# Altium PCB ComponentLib.PcbDoc
Units mil, origin at the board's own origin, x right, y up, seen from the top; angles counter-clockwise.
Board outline 12677.17 x 7086.61 mil, 4 copper layers (Top Layer, GND, Mid-Layer 2, Bottom Layer), stack 62.206 mil thick; 4 components, 291 nets, 319 pads, 113 vias.
Unrouted connection lines stored in the file: 78.
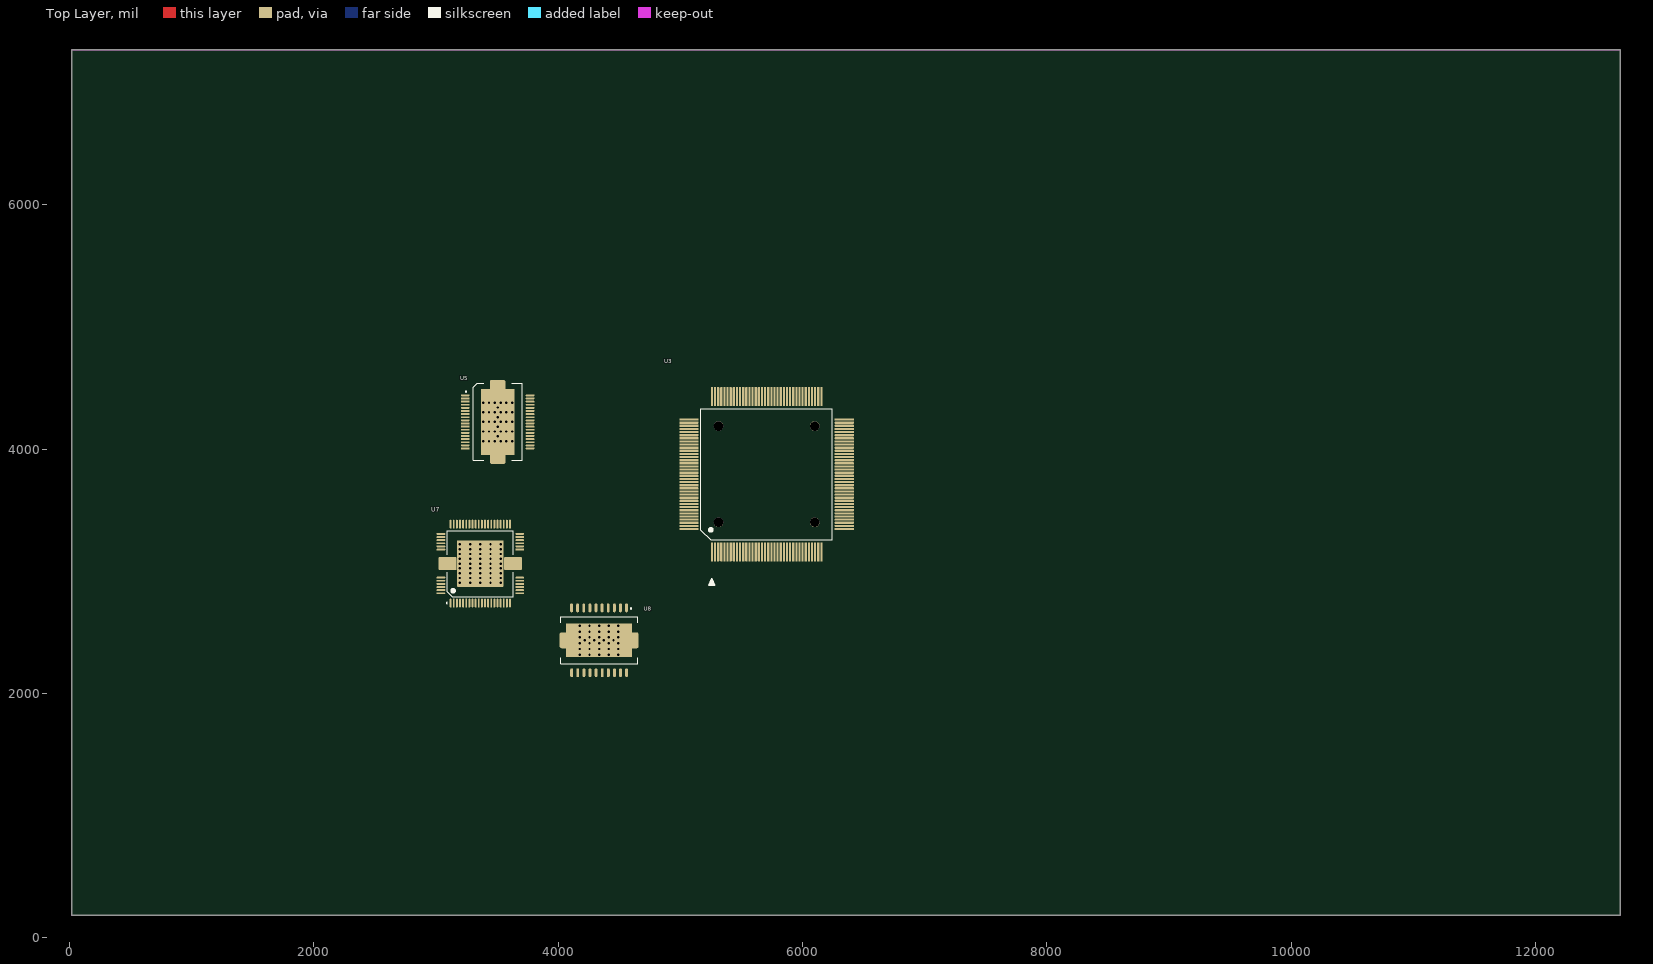
[diagram p0: Top Layer view]
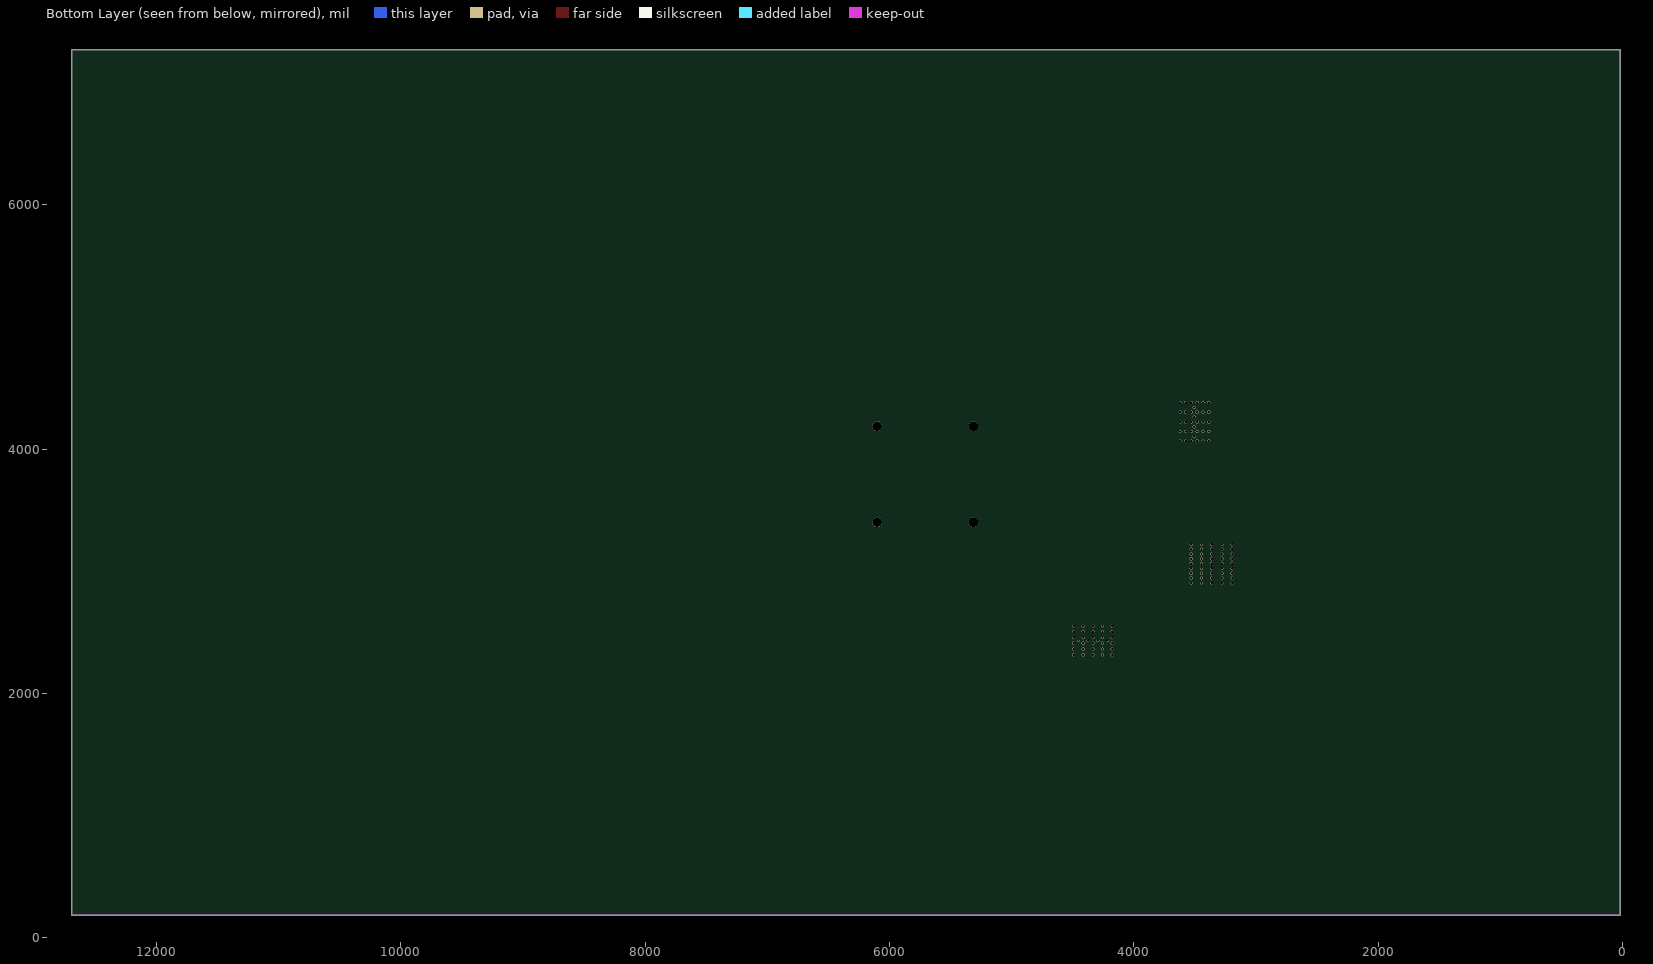
[diagram p1: Bottom Layer view, seen from below]

## Layer stack, top to bottom
Top Solder: solder mask 0.394, Solder Resist, Dk 3.5
Top Layer: signal copper 1.378
Dielectric1: core 18.898, FR-4, Dk 4.8
GND: signal copper 1.378
Dielectric3: core 18.898, FR-4, Dk 4.8
Mid-Layer 2: signal copper 1.378
Dielectric2: prepreg 18.898, FR-4, Dk 4.8
Bottom Layer: signal copper 1.378
Bottom Solder: solder mask 0.394, Solder Resist, Dk 3.5

## Board outline
18,183 18,7269.61 12695.17,7269.61 12695.17,183

## Design rules (kind name [scope] priority, off if disabled: settings)
Clearance "Width = 9.9" [Width = 9.9 vs Width = 9.9] p1: gap=9.46 ignorepadtopadclearanceinfootprint=FALSE except(0: Arc-Hole Track-Hole SMDPad-Hole THPad-Hole Via-Hole Fill-Hole Poly-Hole Region-Hole Text-Hole)
Clearance "P/PG-DSO-20 & MQFP-64-10 & SOT363_N" [HasFootprint('P/PG-DSO-36') OR HasFootprint('MQFP-64-10') OR HasFootprint('SOT363_N') vs All - (InPolygon)] p2: gap=9.84 ignorepadtopadclearanceinfootprint=FALSE except(0: Arc-Hole Track-Hole SMDPad-Hole THPad-Hole Via-Hole Fill-Hole Poly-Hole Region-Hole Text-Hole)
Clearance TSOP48_N [HasFootprint('TSOP48_N')] p3: gap=7.87 ignorepadtopadclearanceinfootprint=FALSE except(0: Arc-Hole Track-Hole SMDPad-Hole THPad-Hole Via-Hole Fill-Hole Poly-Hole Region-Hole Text-Hole)
Clearance SOMQ144-Y [HasFootprint('SOMQ144-Y') vs All - (InPolygon)] p4: gap=7.87 ignorepadtopadclearanceinfootprint=FALSE except(0: Arc-Hole Track-Hole SMDPad-Hole THPad-Hole Via-Hole Fill-Hole Poly-Hole Region-Hole Text-Hole)
Clearance "Keep-Out Layer" [OnLayer('Keep-Out Layer') vs INPOLYGON] p5: gap=30 ignorepadtopadclearanceinfootprint=FALSE except(0: Arc-Hole Track-Hole SMDPad-Hole THPad-Hole Via-Hole Fill-Hole Poly-Hole Region-Hole Text-Hole)
Clearance poly-poly [(InPolygon) vs (InPolygon)] p6: gap=30 ignorepadtopadclearanceinfootprint=FALSE except(0: Arc-Hole Track-Hole SMDPad-Hole THPad-Hole Via-Hole Fill-Hole Poly-Hole Region-Hole Text-Hole)
Clearance "All Poly" [All vs (InPolygon)] p7: gap=25 ignorepadtopadclearanceinfootprint=FALSE except(0: Arc-Hole Track-Hole SMDPad-Hole THPad-Hole Via-Hole Fill-Hole Poly-Hole Region-Hole Text-Hole)
Clearance [All] p8: gap=12 ignorepadtopadclearanceinfootprint=FALSE except(0: Arc-Hole Track-Hole SMDPad-Hole THPad-Hole Via-Hole Fill-Hole Poly-Hole Region-Hole Text-Hole)
ComponentClearance TP2 [HasFootprint('TP2') vs HasFootprint('TP2')] p1: gap=15 collisioncheckmode=3 verticalgap=15 showdistances=FALSE
ComponentClearance [All] p2: gap=15 collisioncheckmode=3 verticalgap=15 showdistances=FALSE
DiffPairsRouting [All] p1 off: maxlimit=10 minlimit=10 mostfreqgap=10 toplayer_minwidth=15 toplayer_maxwidth=15 toplayer_prefwidth=15 midlayer1_minwidth=15 midlayer1_maxwidth=15 midlayer1_prefwidth=15 midlayer2_minwidth=15 midlayer2_maxwidth=15 midlayer2_prefwidth=15 bottomlayer_minwidth=15 bottomlayer_maxwidth=15 bottomlayer_prefwidth=15 maxuncoupledlength=500
FabricationTestpoint [(IsPad And (OnTopLayer Or OnBottomLayer))] p1: side=3 testpointundercomponent=TRUE minsize=40 maxsize=100 preferedsize=60 minholesize=0 maxholesize=40 preferedholesize=32 testpointgrid=1 allowsidetop=TRUE allowsidebottom=TRUE usegrid=TRUE gridtolerance=0.01
Height [All] p1 off: minheight=0 maxheight=1000 prefheight=500
HoleSize [All] p1: absolutevalues=TRUE maxlimit=340 minlimit=1 maxpercent=80.000 minpercent=20.000
HoleToHoleClearance "ADP & DPDT-SW &" [HasFootprint('ADP') OR HasFootprint('DPDT-SW ') OR HasFootprint('SPDT-SW-2')] p1: gap=0 allowstackedmicrovias=TRUE
HoleToHoleClearance [All] p2: gap=10 allowstackedmicrovias=TRUE
MinimumAnnularRing [All] p1 off: minimumring=10
MinimumSolderMaskSliver SOT363_N [HasFootprint('SOT363_N')] p1: minsoldermaskwidth=1.84
MinimumSolderMaskSliver [All] p2: minsoldermaskwidth=10
NetAntennae [All] p1 off: netantennaetolerance=0
PasteMaskExpansion [All] p1: expansion=-1.97
PolygonConnect "Holesize = 236.22" [Holesize = 236.22] p1: connectstyle=Direct reliefconductorwidth=10 reliefentries=4 polygonreliefangle="90 Angle" airgapwidth=10
PolygonConnect U8_21 [All vs InPadClass('U8-21')] p2: connectstyle=Direct reliefconductorwidth=10 reliefentries=4 polygonreliefangle="90 Angle" airgapwidth=10
PolygonConnect U7_65 [All vs InPadClass('U7-65')] p3: connectstyle=Direct reliefconductorwidth=10 reliefentries=4 polygonreliefangle="90 Angle" airgapwidth=10
PolygonConnect U5_37 [All vs InPadClass('U5-37')] p4: connectstyle=Direct reliefconductorwidth=10 reliefentries=4 polygonreliefangle="90 Angle" airgapwidth=10
PolygonConnect "VIA_Direct Connect" [All vs IsVia] p5: connectstyle=Direct reliefconductorwidth=10 reliefentries=4 polygonreliefangle="90 Angle" airgapwidth=10
PolygonConnect [All] p6: connectstyle=Relief reliefconductorwidth=25 reliefentries=4 polygonreliefangle="90 Angle" airgapwidth=10
RoutingVias [All] p1: holewidth=19.68 width=40 viastyle="Through Hole" minholewidth=19.68 minwidth=25.5 maxholewidth=27.56 maxwidth=50
ShortCircuit ShortCircuit_1 [InNet('GND1') vs InNet('GND')] p1: allowed=TRUE
ShortCircuit [All] p2: allowed=FALSE
SilkToSilkClearance [All] p1: silktosilkclearance=2
SilkToSolderMaskClearance SilkToSolderMaskClearance_1 [IsPad] p1: minsilkscreentomaskgap=6 clearancetoexposedcopper=TRUE
SolderMaskExpansion [All] p1: expansion=4 istentingtop=FALSE
Width [All] p1: maxlimit=100 minlimit=1 preferedwidth=12 midlayer1_minwidth=12 midlayer2_minwidth=12 bottomlayer_minwidth=9.9 minimp=50.000000 maximp=50.000000 favimp=50.000000
18 further rules are at their usual default settings.

## Classes and differential pairs
pad class U5-37: U5-37
pad class U3-65: U3-65
pad class "Direct Connect": U8-65
net class 1: A31_DO_IGC2 A32_DO_IGC1
pad class U7-65: U7-65
pad class U8-21: U8-21
differential pair CRK: +CRK_P -CRK_N
differential pair CAN: +CAN_P -CAN_N

## Components (designator, comment, footprint, x,y, rotation, side; value= is the part's Value field where it differs from the comment)
U3 "ST10F273M" SOMQ144-Y 5707,3794 r0 top (schematic designator V9)
U5 "L9741" P/PG-DSO-36 3505.35,4222.48 r270 top (schematic designator U7)
U7 "TLE6244x" MQFP-64-10 3363.11,3062.83 r0 top (schematic designator U9)
U8 "L9935013TR" P/PG-DSO-20 4335.5,2434.65 r180 top

## Footprints (in the part's own frame and the unit in brackets; to place one, negate y for a bottom-side part, rotate by r counter-clockwise, add the part's x,y. Pads: shape width x height; smd on the part's side, far side on the other; paste and mask are expansions set on the pad)
MQFP-64-10 [mm]
  oval 0.4x1.83 smd mask+0.127: 1(-6.175,-8.2) 2(-5.525,-8.2) 3(-4.875,-8.2) 4(-4.225,-8.2) 5(-3.575,-8.2) 6(-2.925,-8.2) 7(-2.275,-8.2) 8(-1.625,-8.2) 9(-0.975,-8.2) 10(-0.325,-8.2) 11(0.325,-8.2) 12(0.975,-8.2) 13(1.625,-8.2) 14(2.275,-8.2) 15(2.925,-8.2) 16(3.575,-8.2) 17(4.225,-8.2) 18(4.875,-8.2) 19(5.525,-8.2) 20(6.175,-8.2) 33(6.175,8.2) 34(5.525,8.2) 35(4.875,8.2) 36(4.225,8.2) 37(3.575,8.2) 38(2.925,8.2) 39(2.275,8.2) 40(1.625,8.2) 41(0.975,8.2) 42(0.325,8.2) 43(-0.325,8.2) 44(-0.975,8.2) 45(-1.625,8.2) 46(-2.275,8.2) 47(-2.925,8.2) 48(-3.575,8.2) 49(-4.225,8.2) 50(-4.875,8.2) 51(-5.525,8.2) 52(-6.175,8.2)
  oval 1.83x0.4 smd mask+0.127: 21(8.2,-6.175) 22(8.2,-5.525) 23(8.2,-4.875) 24(8.2,-4.225) 25(8.2,-3.575) 26(8.2,-2.925) 27(8.2,2.925) 28(8.2,3.575) 29(8.2,4.225) 30(8.2,4.875) 31(8.2,5.525) 32(8.2,6.175) 53(-8.2,6.175) 54(-8.2,5.525) 55(-8.2,4.875) 56(-8.2,4.225) 57(-8.2,3.575) 58(-8.2,2.925) 59(-8.2,-2.925) 60(-8.2,-3.575) 61(-8.2,-4.225) 62(-8.2,-4.875) 63(-8.2,-5.525) 64(-8.2,-6.175)
  rrect25% 1.3x2.3 smd paste+0 mask+0: 65(-7.4,0) 65(-5.7,0) 65(5.7,0) 65(7.4,0)
  rrect10% 3.7x2.65 smd paste-3.8 mask+0: 65(-6.8,0) 65(6.8,0)
  rrect50% 0.6x2.3 smd paste+0 mask+0: 65(-3.187,-2.9) 65(-3.187,0) 65(-3.187,2.9) 65(-1.063,-2.9) 65(-1.063,0) 65(-1.063,2.9) 65(1.063,-2.9) 65(1.063,0) 65(1.063,2.9) 65(3.188,-2.9) 65(3.188,0) 65(3.188,2.9)
  rrect25% 0.8x9.7 smd paste-0.8 mask+0: 65(-3.187,0) 65(-1.063,0) 65(1.063,0) 65(3.188,0)
  rrect5% 9.7x9.7 smd paste-9.8 mask-9.8: 65(0,0)
  silkscreen extent -7.07,-8.32 6.82,6.81, body extent -9.11,-9.11 9.12,9.12, height 3.33
P/PG-DSO-20 [mm]
  oval 0.6x1.83 smd: 1(-5.702,-6.74) 2(-4.432,-6.74) 3(-3.162,-6.74) 4(-1.892,-6.74) 5(-0.622,-6.74) 6(0.648,-6.74) 7(1.918,-6.74) 8(3.188,-6.74) 9(4.458,-6.74) 10(5.728,-6.74) 11(5.702,6.74) 12(4.432,6.74) 13(3.162,6.74) 14(1.892,6.74) 15(0.622,6.74) 16(-0.648,6.74) 17(-1.918,6.74) 18(-3.188,6.74) 19(-4.458,6.74) 20(-5.728,6.74)
  rrect25% 2.3x3.2 smd: 21(-7,0) 21(7,0)
  rrect25% 3x3.3 smd paste-3.3: 21(-6.7,0) 21(6.7,0)
  rrect50% 0.5x2.5 smd: 21(-3,2) 21(-3,-2) 21(-1,2) 21(-1,-2) 21(1,2) 21(1,-2) 21(3,2) 21(3,-2)
  rect 13.7x7 smd paste-3.5 mask-3.5: 21(0,0)
  silkscreen extent -8.01,-6.72 7.99,4.9, body extent -8.2,-7.66 8.2,7.66, height 3.64
P/PG-DSO-36 [mm]
  oval 0.4x1.83 smd mask+0.127: 1(-5.525,-6.74) 2(-4.875,-6.74) 3(-4.225,-6.74) 4(-3.575,-6.74) 5(-2.925,-6.74) 6(-2.275,-6.74) 7(-1.625,-6.74) 8(-0.975,-6.74) 9(-0.325,-6.74) 10(0.325,-6.74) 11(0.975,-6.74) 12(1.625,-6.74) 13(2.275,-6.74) 14(2.925,-6.74) 15(3.575,-6.74) 16(4.225,-6.74) 17(4.875,-6.74) 18(5.525,-6.74) 19(5.525,6.74) 20(4.875,6.74) 21(4.225,6.74) 22(3.575,6.74) 23(2.925,6.74) 24(2.275,6.74) 25(1.625,6.74) 26(0.975,6.74) 27(0.325,6.74) 28(-0.325,6.74) 29(-0.975,6.74) 30(-1.625,6.74) 31(-2.275,6.74) 32(-2.925,6.74) 33(-3.575,6.74) 34(-4.225,6.74) 35(-4.875,6.74) 36(-5.525,6.74)
  rrect25% 2.9x3.2 smd: 37(-7.3,0) 37(7.3,0)
  rrect50% 0.5x2.5 smd: 37(-5,2) 37(-5,-2) 37(-3,2) 37(-3,-2) 37(-1,2) 37(-1,-2) 37(1,2) 37(1,-2) 37(3,2) 37(3,-2) 37(5,2) 37(5,-2)
  rect 13.7x7 smd paste-3.5 mask-3.5: 37(0,0)
  silkscreen extent -8,-6.72 8,5.1, body extent -8.75,-7.65 8.75,7.66, height 3.53
SOMQ144-Y [mm]
  rrect50% 0.45x4 smd: 1(-11.375,-16.15) 2(-10.725,-16.15) 3(-10.075,-16.15) 4(-9.425,-16.15) 5(-8.775,-16.15) 6(-8.125,-16.15) 7(-7.475,-16.15) 8(-6.825,-16.15) 9(-6.175,-16.15) 10(-5.525,-16.15) 11(-4.875,-16.15) 12(-4.225,-16.15) 13(-3.575,-16.15) 14(-2.925,-16.15) 15(-2.275,-16.15) 16(-1.625,-16.15) 17(-0.975,-16.15) 18(-0.325,-16.15) 19(0.325,-16.15) 20(0.975,-16.15) 21(1.625,-16.15) 22(2.275,-16.15) 23(2.925,-16.15) 24(3.575,-16.15) 25(4.225,-16.15) 26(4.875,-16.15) 27(5.525,-16.15) 28(6.175,-16.15) 29(6.825,-16.15) 30(7.475,-16.15) 31(8.125,-16.15) 32(8.775,-16.15) 33(9.425,-16.15) 34(10.075,-16.15) 35(10.725,-16.15) 36(11.375,-16.15) 73(11.375,16.15) 74(10.725,16.15) 75(10.075,16.15) 76(9.425,16.15) 77(8.775,16.15) 78(8.125,16.15) 79(7.475,16.15) 80(6.825,16.15) 81(6.175,16.15) 82(5.525,16.15) 83(4.875,16.15) 84(4.225,16.15) 85(3.575,16.15) 86(2.925,16.15) 87(2.275,16.15) 88(1.625,16.15) 89(0.975,16.15) 90(0.325,16.15) 91(-0.325,16.15) 92(-0.975,16.15) 93(-1.625,16.15) 94(-2.275,16.15) 95(-2.925,16.15) 96(-3.575,16.15) 97(-4.225,16.15) 98(-4.875,16.15) 99(-5.525,16.15) 100(-6.175,16.15) 101(-6.825,16.15) 102(-7.475,16.15) 103(-8.125,16.15) 104(-8.775,16.15) 105(-9.425,16.15) 106(-10.075,16.15) 107(-10.725,16.15) 108(-11.375,16.15)
  rrect50% 4x0.45 smd: 37(16.15,-11.375) 38(16.15,-10.725) 39(16.15,-10.075) 40(16.15,-9.425) 41(16.15,-8.775) 42(16.15,-8.125) 43(16.15,-7.475) 44(16.15,-6.825) 45(16.15,-6.175) 46(16.15,-5.525) 47(16.15,-4.875) 48(16.15,-4.225) 49(16.15,-3.575) 50(16.15,-2.925) 51(16.15,-2.275) 52(16.15,-1.625) 53(16.15,-0.975) 54(16.15,-0.325) 55(16.15,0.325) 56(16.15,0.975) 57(16.15,1.625) 58(16.15,2.275) 59(16.15,2.925) 60(16.15,3.575) 61(16.15,4.225) 62(16.15,4.875) 63(16.15,5.525) 64(16.15,6.175) 65(16.15,6.825) 66(16.15,7.475) 67(16.15,8.125) 68(16.15,8.775) 69(16.15,9.425) 70(16.15,10.075) 71(16.15,10.725) 72(16.15,11.375) 109(-16.15,11.375) 110(-16.15,10.725) 111(-16.15,10.075) 112(-16.15,9.425) 113(-16.15,8.775) 114(-16.15,8.125) 115(-16.15,7.475) 116(-16.15,6.825) 117(-16.15,6.175) 118(-16.15,5.525) 119(-16.15,4.875) 120(-16.15,4.225) 121(-16.15,3.575) 122(-16.15,2.925) 123(-16.15,2.275) 124(-16.15,1.625) 125(-16.15,0.975) 126(-16.15,0.325) 127(-16.15,-0.325) 128(-16.15,-0.975) 129(-16.15,-1.625) 130(-16.15,-2.275) 131(-16.15,-2.925) 132(-16.15,-3.575) 133(-16.15,-4.225) 134(-16.15,-4.875) 135(-16.15,-5.525) 136(-16.15,-6.175) 137(-16.15,-6.825) 138(-16.15,-7.475) 139(-16.15,-8.125) 140(-16.15,-8.775) 141(-16.15,-9.425) 142(-16.15,-10.075) 143(-16.15,-10.725) 144(-16.15,-11.375)
  round 2 hole 2 unplated: ""(-10,-10) ""(-10,10) ""(10,-10) ""(10,10)
  silkscreen extent -13.65,-23.06 13.65,13.65, body extent -19.93,-19.95 19.95,19.95, height 11.2

## Part data
U3: "Microcontroller"
U5: "POWERSO-36"
U7: "G-MQFP-64-10"
U8: library part L9935_B, "PowerSO20"

## Via types
v1: diameter 25.59, hole 19.68, Top Layer to Bottom Layer, tented both sides, 113 vias

## Nets (pads, with @x,y where several pads share a name; then routed paths per layer and width w, separated by ;. In a path a pad name is that pad's centre, name@x,y a point inside that pad or via, vN(x,y) a via of type N, cw(c..) or ccw(c..) an arc to the next point about the centre after c; other vN are vias at no path point)
A1_STEPO_STPB_POS: U8.13
A1_STEPO_STPB_POS_CON: 
A2_STEPO_STPB_NEG: U8.9
A2_STEPO_STPB_NEG_CON: 
A5_CVVT: U7.9
A5_CVVT_CON: 
A7_DO_RLY_MAIN: 
A7_DO_RLY_MAIN_CON: 
A9_DO_RLY_FAN_H: U7.45
A10_DO_RLY_FAN_L: U7.44
A10_DO_RLY_FAN_L_CON: 
A14_AI_VLS_DWN: 
A31_DO_IGC2: 
A32_DO_IGC1: 
A35_PWMO_LSH_UPO2: U7.2 U7.3
A35_PWMO_LSH_UPO2_CON: 
A39_DO_HOT_LAMP: U7.57
A41_DO_RLY_ACCO: U7.49
A42_AI_KNKS: 
A44_AI_VLS_UP: 
A45_AI_DIAGFAN: 
A61_STEPO_STPA_POS: U8.2
A61_STEPO_STPA_POS_CON: 
A62_STEPO_STPA_NEG: U8.18
A62_STEPO_STPA_NEG_CON: 
A64_PWMO_LSH_DOWNO2: U7.50 U7.51
A66_AI_VB_RLY: U8.16
A68_PWMO_ESS: U7.34 U7.35
A68_PWMO_ESS_CON: 
A69_DO_RLY_EFP: U7.8
A69_DO_RLY_EFP_CON: 
A71_DO_MIL: U7.60
A73_PWMO_CPPWM: U7.18 U7.19
A73_PWMO_CPPWM_CON: 
A74_AI_TPS: 
A75_AI_MAP: 
B18_AI_TACE: 
B21_VCCO_VCC3_TPS: U5.16
B22_DI_CAM1: 
B23_DI_PRS_SWT: 
B27_DI_CLU_SWI: 
B29_VB_IGK: 
B30_VBD: 
B46_AI_FTL: 
B50_VCCO_TMAP: U5.15
B51_FREQI_VS: 
B52_DI_ACIN: 
B53_FREQI_VS_RR: 
B56_KLINE_DIAG: U5.7
B58_BSL: 
B59_DO_IV1: U7.16 U7.17
B59_DO_IV1_CON: 
B60_DO_IV3: U7.14 U7.15
B60_DO_IV3_CON: 
B76_AI_TCO: 
B78_AI_TIA: 
B83_DI_PSTE_SWI: 
B87_DI_ACP_SWI: 
B89_DO_IV4: U7.38 U7.39
B89_DO_IV4_CON: 
B90_DO_IV2: U7.36 U7.37
B90_DO_IV2_CON: 
C167_HBR_E\N\: U3.68
CAN_N: U5.13
CAN_P: U5.14
CRK_N: 
CRK_P: 
E\A\: U3.99
FLASHCS: 
GND: U3.18 U3.38 U3.45 U3.55 U3.71 U3.83 U3.94 U3.97 U3.110 U3.127 U3.139 U3.143 U5.1 U5.37 U7.11 U7.12 U7.26 U7.27 U7.29 U7.41 U7.42 U7.58 U7.59 U7.65 U8.1 U8.10 U8.11 U8.20 U8.21
  other v1: 4178.02,2316.54 4256.76,2316.54 4335.5,2316.54 4414.24,2316.54 4492.98,2316.54 4178.02,2363.78 4256.76,2363.78 4335.5,2363.78 4414.24,2363.78 4492.98,2363.78 4178.02,2411.02 4256.76,2411.02 4335.5,2411.02 4414.24,2411.02 4492.98,2411.02 4217.39,2434.65 4296.13,2434.65 4374.87,2434.65 4453.61,2434.65 4178.02,2458.27 4256.76,2458.27 4335.5,2458.27 4414.24,2458.27 4492.98,2458.27 4178.02,2505.51 4256.76,2505.51 4335.5,2505.51 4414.24,2505.51 4492.98,2505.51 4178.02,2552.76 4256.76,2552.76 4335.5,2552.76 4414.24,2552.76 4492.98,2552.76 3195.79,2905.35 3279.45,2905.35 3363.11,2905.35 3446.77,2905.35 3530.43,2905.35 3195.79,2944.72 3279.45,2944.72 3363.11,2944.72 3446.77,2944.72 3530.43,2944.72 3195.79,2984.09 3279.45,2984.09 3363.11,2984.09 3446.77,2984.09 3530.43,2984.09 3195.79,3023.46 3279.45,3023.46 3363.11,3023.46 3446.77,3023.46 3530.43,3023.46 3195.79,3062.83 3279.45,3062.83 3363.11,3062.83 3446.77,3062.83 3530.43,3062.83 3195.79,3102.2 3279.45,3102.2 3363.11,3102.2 3446.77,3102.2 3530.43,3102.2 3195.79,3141.57 3279.45,3141.57 3363.11,3141.57 3446.77,3141.57 3530.43,3141.57 3195.79,3180.94 3279.45,3180.94 3363.11,3180.94 3446.77,3180.94 3530.43,3180.94 3195.79,3220.31 3279.45,3220.31 3363.11,3220.31 3446.77,3220.31 3530.43,3220.31 3387.24,4065 3434.48,4065 3481.73,4065 3528.97,4065 3576.22,4065 3623.46,4065 3505.35,4104.37 3387.24,4143.74 3434.48,4143.74 3481.73,4143.74 3528.97,4143.74 3576.22,4143.74 3623.46,4143.74 3505.35,4183.11 3387.24,4222.48 3434.48,4222.48 3481.73,4222.48 3528.97,4222.48 3576.22,4222.48 3623.46,4222.48 3505.35,4261.85 3387.24,4301.22 3434.48,4301.22 3481.73,4301.22 3528.97,4301.22 3576.22,4301.22 3623.46,4301.22 3505.35,4340.59 3387.24,4379.96 3434.48,4379.96 3481.73,4379.96 3528.97,4379.96 3576.22,4379.96 3623.46,4379.96
HBR_E\N\: U8.8
HOT_LAMP_C: U7.7 U7.22 U7.43 U7.46 U7.48 U7.61
IGC1_FB: 
IGC2_FB: 
MRST: U3.75 U8.5
MTSR: U3.76 U7.55 U8.4
NC: U5.21 U5.26
NetC3_1: 
NetC6_1: 
NetC12_1: U3.56
NetC14_2: 
NetC30_1: U5.18
NetC41_1: 
NetC55_1: 
NetC60_2: U7.23
NetC62_2: 
NetC80_2: U8.15
NetC81_2: U8.14
NetC92_2: 
NetC99_2: U5.33
NetC102_1: U5.32
NetC104_2: U5.35
NetC109_2: U5.22
NetC114_1: 
NetC117_1: 
NetC120_1: 
NetC123_1: 
NetC123_2: 
NetC126_2: U3.84
NetD2_1: 
NetD2_2: 
NetD3_2: U7.4
NetD5_1: 
NetD5_2: 
NetD6_1: 
NetD11_2: 
NetD21_1: 
NetD22_1: 
NetD22_2: U3.11
NetD23_1: 
NetD23_2: U3.24
NetD24_1: 
NetD37_1: 
NetD38_1: 
NetD39_1: 
NetDZ2_1: 
NetFUSE1_1: 
NetIGK_1: 
NetJ1_1: 
NetJ2_1: 
NetJ3_1: 
NetJ4_1: 
NetJ5_1: 
NetJ6_1: 
NetJ7_1: 
NetJ8_1: 
NetJ9_1: 
NetJ11_1: 
NetJ13_1: 
NetJ14_1: 
NetJ16_1: 
NetJ17_1: 
NetJ19_1: 
NetQ1_3: 
NetQ1_6: 
NetQ2_1: 
NetQ3_1: 
NetQ4_3: 
NetR28_1: 
NetR29_1: 
NetR32_1: 
NetR38_2: U7.53
NetR45_1: U7.25
NetR46_1: U7.28
NetR47_1: U7.30
NetR53_1: U8.19
NetR65_1: U8.12
NetR70_1: 
NetR76_1: 
NetR88_1: 
NetR89_2: 
NetR103_2: U5.34
NetR125_2: U5.30
NetR130_1: 
NetTP12_1: 
NetTP13_1: 
NetTP14_1: 
NetTP17_1: 
NetTP20_1: 
NetTP21_1: 
NetTP46_1: U3.98
NetTP165_1: U3.12
NetTP167_1: U3.15
NetTP168_1: U3.16
NetTP170_1: U3.19
NetTP175_1: U3.25
NetTP262_1: 
NetTP266_1: 
NetTP267_1: 
NetTP269_1: 
NOTRSTOUT: U7.31
P04: U3.104
RLY_MAIN_ONBOARD: 
RST: U3.140 U5.20
RX: U3.78 U5.9
RXC: U3.90 U5.11
SCLK: U3.80 U7.54 U8.3
TX: U3.77 U5.6
TXC: U3.91 U5.12
U1_1_C\S\0\: U3.1
U1_2_C\S\1\: U3.2
U1_3_C\S\2\: U3.3
U1_3_C\S\2\_1: 
U1_4_P6.3/C\S\3\: U3.4
U1_5_P6.4/C\S\4\: U3.5
U1_6_P6.5/H\O\L\D\: U3.6
U1_7_P6.6/H\L\D\A\: U3.7 U5.36
U1_8_P6.7/B\R\E\Q\: U3.8 U7.56
U1_9_P8.0/CC16IO: U3.9 U7.5
U1_10_P8.1/CC17IO: U3.10 U7.62
U1_13_P8.4/CC20IO: U3.13 U7.20
U1_14_P8.5/CC21IO: U3.14
U1_20_P7.1/POUT1: U3.20 U7.10
U1_21_P7.2/POUT2: U3.21
U1_22_P7.4/POUT3: U3.22 U7.1
U1_23_P7.4/CC28IO: U3.23 U7.33
U1_25_CS_CRK_TH: U3.66 U5.31
U1_26_P7.7/CC31IO: U3.26
U1_27_P5.0/AN0: U3.27
U1_28: U3.28
U1_29_P5.2/AN2: U3.29
U1_30_P5.3/AN3: U3.30
U1_31_P5.4/AN4: U3.31
U1_32_P5.5/AN5: U3.32
U1_33_P5.6/AN6: U3.33
U1_34_P5.7/AN7: U3.34
U1_35_P5.8/AN8: U3.35
U1_36_P5.9/AN9: U3.36
U1_37_VREF: U3.37
U1_39_P5.10/AN10/T6EUD: U3.39
U1_40_P5.11/AN11/T5EUD: U3.40
U1_41_P5.12/AN12/T6IN: U3.41
U1_42_P5.13/AN13/T5IN: U3.42
U1_43_P5.14/AN14/T4EUD: U3.43
U1_44_P5.15/AN15/T2EUD: U3.44
U1_47_P2.0/CC0IO: U3.47
U1_48_P2.1/CC1IO: U3.48
U1_49_P2.2/CC2IO: U3.49
U1_50_P2.3/CC3IO: U3.50
U1_51_P2.4/CC4IO: U3.51
U1_52_P2.5/CC5IO: U3.52 U7.6
U1_53_P2.6/CC6IO: U3.53 U7.63
U1_54_P2.7/CC7IO: U3.54 U7.13
U1_57_P2.8/CC8IO/EX0IN: U3.57 U7.40
U1_58_P2.9/CC9IO/EX1IN: U3.58
U1_59_P2.10/CC10IO/EX2IN: U3.59
U1_60_P2.11/CC11IO/EX3IN: U3.60
U1_61_P2.12/CC12IO/EX4IN: U3.61
U1_62: U3.62
U1_63_P2.14/CC14IO/EX6IN: U3.63
U1_67/65/64: U3.64 U3.65 U3.67
U1_69_P3.4/T3EUD: U3.69
U1_70_P3.5/T4IN: U3.70
U1_73: U3.73
U1_74_P3.7/T2IN: U3.74
U1_79: U3.79
U1_81: U3.81
U1_85_A16: U3.85
U1_86_A17: U3.86
U1_87_A18: U3.87
U1_88: U3.88
U1_89_P4.4/A20/*: U3.89
U1_90_P4.5/A21/*: U3.92 U8.7
U1_100_AD0: U3.100
U1_101_AD1: U3.101
U1_102_AD2: U3.102
U1_103_AD3: U3.103
U1_105_AD5: U3.105
U1_106_AD6: U3.106
U1_107_AD7: U3.107
U1_108_AD8: U3.108
U1_111_AD9: U3.111
U1_112_AD10: U3.112
U1_113_AD11: U3.113
U1_114_AD12: U3.114
U1_115_AD13: U3.115
U1_116_AD14: U3.116
U1_117_AD15: U3.117
U1_118_A0: U3.118
U1_119_A1: U3.119
U1_120_A2: U3.120
U1_121_A3: U3.121
U1_122_A4: U3.122
U1_123_A5: U3.123
U1_124_A6: U3.124
U1_125_A7: U3.125
U1_128_A8: U3.128
U1_129_A9: U3.129
U1_130_A10: U3.130
U1_131_A11: U3.131
U1_132_A12: U3.132
U1_133_A13: U3.133
U1_134_A14: U3.134
U1_135_A15: U3.135
U1_141_NOTRSTOUT1: U3.141
U1_RD: U3.95
U1_WR: U3.96
U1_XTAL1: U3.138
U1_XTAL2: U3.137
U6_3: U5.17
V_IG: 
V_RLY_LSD: 
VBD: 
VCC: 
VCC_ISCV: U8.6
VCC_KNOCK: 
VCC_LM2903: 
VCC_LSD: U7.47
VCC_MCU: U3.17 U3.46 U3.72 U3.82 U3.93 U3.109 U3.126 U3.136 U3.142
VREF: 
VSBAT: U5.19
pads on no net: U3. U3.144 U5.2 U5.3 U5.4 U5.5 U5.8 U5.10 U5.23 U5.24 U5.25 U5.27 U5.28 U5.29 U7.21 U7.24 U7.32 U7.52 U7.64 U8.17

## Keep-outs
Keep-Out Layer:
  lines w10: 12695.16,183 18,183 18,7269.61 12695.16,7269.61